# Altium PCB 40%_ws2812.PcbDoc
Units mm, origin at the board's own origin, x right, y up, seen from the top; angles counter-clockwise.
Board outline 228.6 x 76.2 mm, 2 copper layers (Top Layer, Bottom Layer), stack 1.571 mm thick; 40 components, 0 nets, 280 pads, 0 vias.
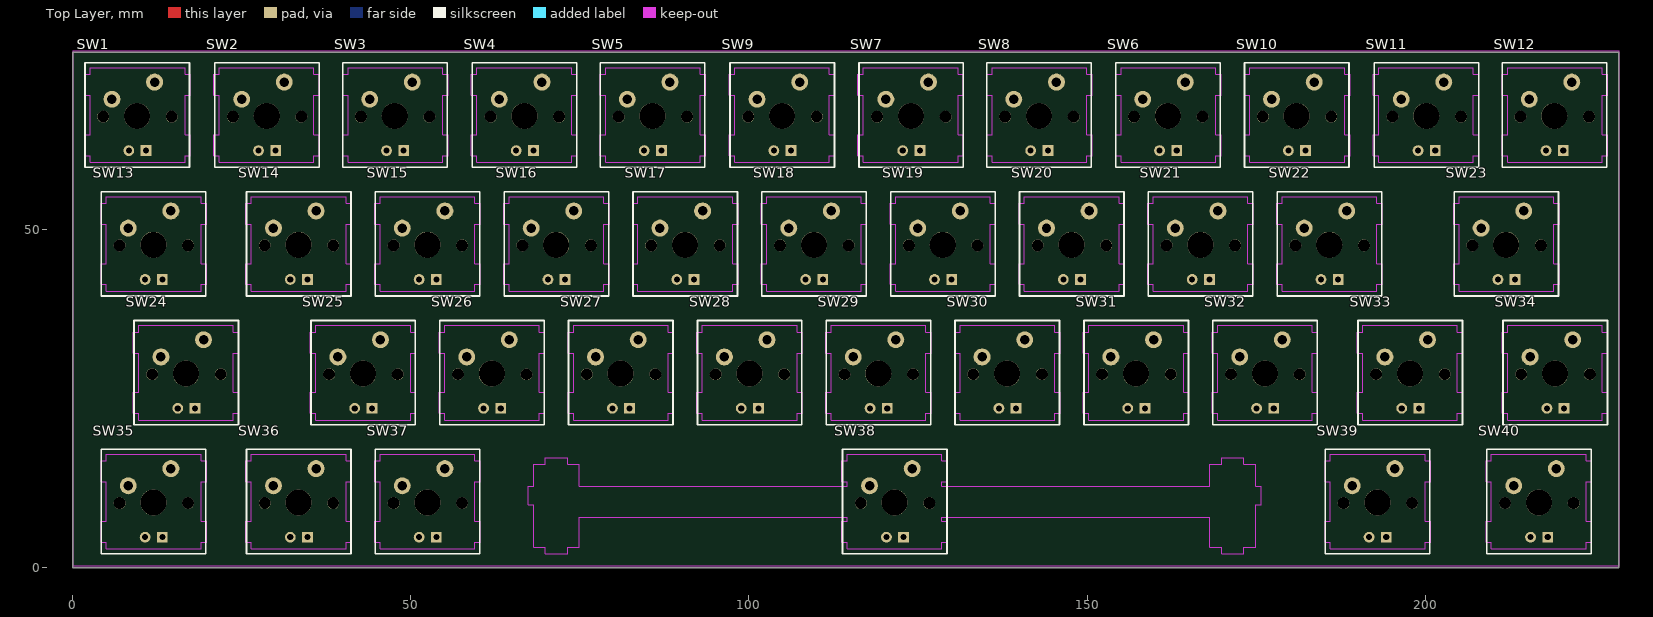
[diagram p0: Top Layer view]
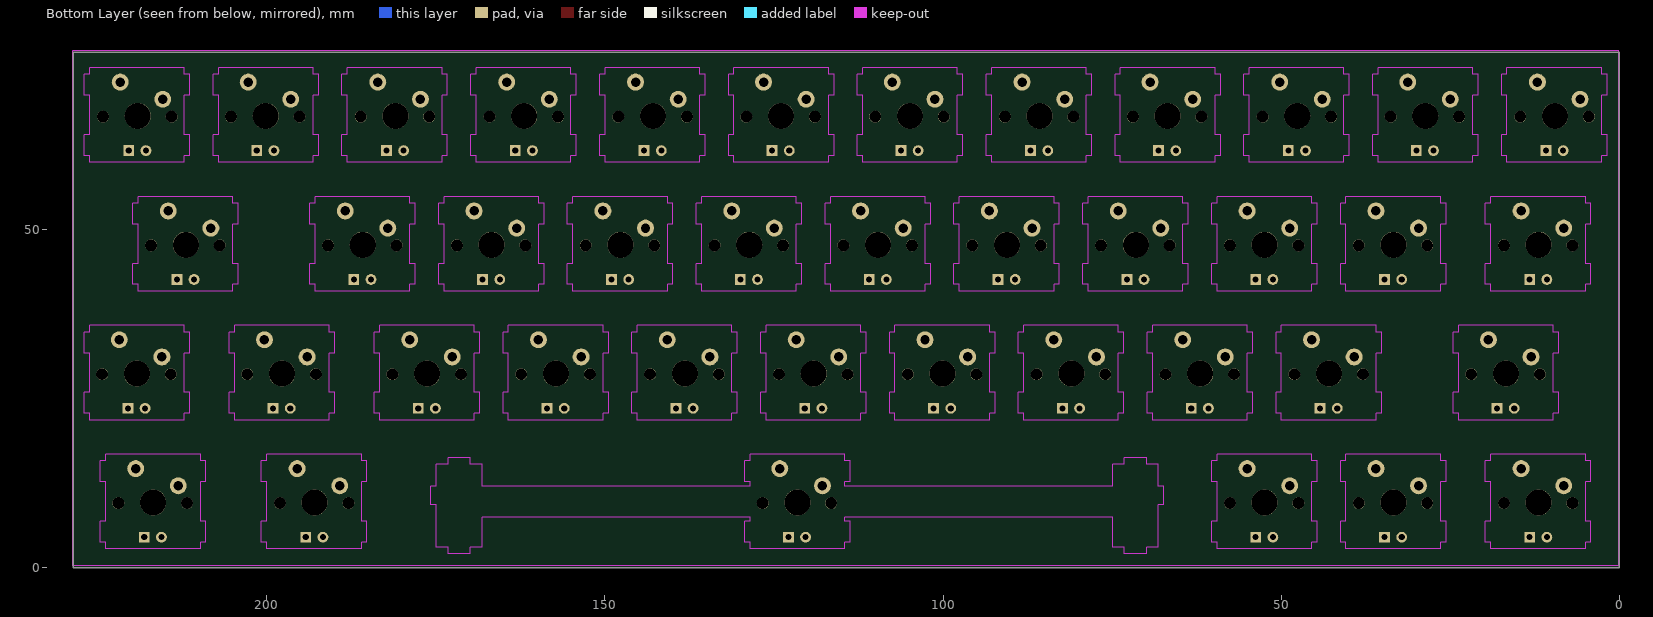
[diagram p1: Bottom Layer view, seen from below]

## Layer stack, top to bottom
Top Solder: solder mask 0.0102, Solder Resist, Dk 3.5
Top Layer: signal copper 0.0356
Dielectric 1: dielectric 1.5, 1.265, Dk 4.8
Bottom Layer: signal copper 0.0356
Bottom Solder: solder mask 0.0102, Solder Resist, Dk 3.5

## Board outline
0,0 228.6,0 228.6,76.2 0,76.2

## Design rules (kind name [scope] priority, off if disabled: settings)
Clearance [All] p1: gap=0.254 ignorepadtopadclearanceinfootprint=FALSE except(0: Arc-Hole Track-Hole SMDPad-Hole THPad-Hole Via-Hole Fill-Hole Poly-Hole Region-Hole Text-Hole)
PolygonConnect [All] p1: connectstyle=Relief reliefconductorwidth=0.254 reliefentries=4 polygonreliefangle="90 Angle" airgapwidth=0.254
RoutingVias [All] p1: holewidth=0.711 width=1.27 viastyle="Through Hole" minholewidth=0.711 minwidth=1.27 maxholewidth=0.711 maxwidth=1.27
SolderMaskExpansion [All] p1: expansion=0.102 istentingtop=FALSE
Width [All] p1: maxlimit=0.254 minlimit=0.254 preferedwidth=0.254
30 further rules are at their usual default settings.

## Components (designator, comment, footprint, x,y, rotation, side; value= is the part's Value field where it differs from the comment)
SW1 "Cherry" SW_Cherry_MX_WS2812 9.525,66.802 r0 top
SW2 "Cherry" SW_Cherry_MX_WS2812 28.702,66.802 r0 top
SW3 "Cherry" SW_Cherry_MX_WS2812 47.625,66.802 r0 top
SW4 "Cherry" SW_Cherry_MX_WS2812 66.802,66.802 r0 top
SW5 "Cherry" SW_Cherry_MX_WS2812 85.725,66.802 r0 top
SW6 "Cherry" SW_Cherry_MX_WS2812 161.925,66.802 r0 top
SW7 "Cherry" SW_Cherry_MX_WS2812 123.952,66.802 r0 top
SW8 "Cherry" SW_Cherry_MX_WS2812 142.875,66.802 r0 top
SW9 "Cherry" SW_Cherry_MX_WS2812 104.902,66.802 r0 top
SW10 "Cherry" SW_Cherry_MX_WS2812 180.975,66.802 r0 top
SW11 "Cherry" SW_Cherry_MX_WS2812 200.152,66.802 r0 top
SW12 "Cherry" SW_Cherry_MX_WS2812 219.075,66.802 r0 top
SW13 "Cherry" SW_Cherry_MX_WS2812 11.938,47.752 r0 top
SW14 "Cherry" SW_Cherry_MX_WS2812 33.401,47.752 r0 top
SW15 "Cherry" SW_Cherry_MX_WS2812 52.451,47.752 r0 top
SW16 "Cherry" SW_Cherry_MX_WS2812 71.501,47.752 r0 top
SW17 "Cherry" SW_Cherry_MX_WS2812 90.551,47.752 r0 top
SW18 "Cherry" SW_Cherry_MX_WS2812 109.601,47.752 r0 top
SW19 "Cherry" SW_Cherry_MX_WS2812 128.651,47.752 r0 top
SW20 "Cherry" SW_Cherry_MX_WS2812 147.701,47.752 r0 top
SW21 "Cherry" SW_Cherry_MX_WS2812 166.751,47.752 r0 top
SW22 "Cherry" SW_Cherry_MX_WS2812 185.801,47.752 r0 top
SW23 "Cherry" SW_Cherry_MX_WS2812 211.963,47.752 r0 top
SW24 "Cherry" SW_Cherry_MX_WS2812 16.764,28.702 r0 top
SW25 "Cherry" SW_Cherry_MX_WS2812 42.926,28.702 r0 top
SW26 "Cherry" SW_Cherry_MX_WS2812 61.976,28.702 r0 top
SW27 "Cherry" SW_Cherry_MX_WS2812 81.026,28.702 r0 top
SW28 "Cherry" SW_Cherry_MX_WS2812 100.076,28.702 r0 top
SW29 "Cherry" SW_Cherry_MX_WS2812 119.126,28.702 r0 top
SW30 "Cherry" SW_Cherry_MX_WS2812 138.176,28.702 r0 top
SW31 "Cherry" SW_Cherry_MX_WS2812 157.226,28.702 r0 top
SW32 "Cherry" SW_Cherry_MX_WS2812 176.276,28.702 r0 top
SW33 "Cherry" SW_Cherry_MX_WS2812 197.739,28.702 r0 top
SW34 "Cherry" SW_Cherry_MX_WS2812 219.202,28.702 r0 top
SW35 "Cherry" SW_Cherry_MX_WS2812 11.938,9.652 r0 top
SW36 "Cherry" SW_Cherry_MX_WS2812 33.401,9.652 r0 top
SW37 "Cherry" SW_Cherry_MX_WS2812 52.451,9.652 r0 top
SW38 "Cherry" SW_Cherry_MX_WS2812 121.539,9.652 r0 top
SW39 "Cherry" SW_Cherry_MX_WS2812 192.913,9.652 r0 top
SW40 "Cherry" SW_Cherry_MX_WS2812 216.789,9.652 r0 top

## Footprints (in the part's own frame and the unit in brackets; to place one, negate y for a bottom-side part, rotate by r counter-clockwise, add the part's x,y. Pads: shape width x height; smd on the part's side, far side on the other; paste and mask are expansions set on the pad)
SW_Cherry_MX_WS2812 [mm] "WS2812键帽"
  round 2.5 hole 1.4: 1(-3.708,2.464) 2(2.591,5.004)
  rect 1.6x1.6 hole 0.9: 3(1.321,-5.131)
  round 1.6 hole 0.9: 4(-1.219,-5.131)
  round 1.75 hole 1.75: ""(-5.004,-0.102) ""(5.131,-0.102)
  round 3.85 hole 3.85: ""(0,0)
  silkscreen extent -7.7,-7.57 7.75,7.85, body extent -9.19,-9.18 9.13,9.12, height 19.05

## Part data
SW1 SW2 SW3 SW4 SW5 SW6 SW7 SW8 SW9 SW10 SW11 SW12 SW13 SW14 SW15 SW16 SW17 SW18 SW19 SW20 SW21 SW22 SW23 SW24 SW25 SW26 SW27 SW28 SW29 SW30 SW31 SW32 SW33 SW34 SW35 SW36 SW37 SW38 SW39 SW40: library part LSW, "带灯机械按键开关", BOM名称=带灯机械按键开关, 学习资源=www.ooocke.com, 版权归属=源创客

## Nets (pads, with @x,y where several pads share a name; then routed paths per layer and width w, separated by ;. In a path a pad name is that pad's centre, name@x,y a point inside that pad or via, vN(x,y) a via of type N, cw(c..) or ccw(c..) an arc to the next point about the centre after c; other vN are vias at no path point)
pads on no net: SW1. SW1.1 SW1.2 SW1.3 SW1.4 SW2. SW2.1 SW2.2 SW2.3 SW2.4 SW3. SW3.1 SW3.2 SW3.3 SW3.4 SW4. SW4.1 SW4.2 SW4.3 SW4.4 SW5. SW5.1 SW5.2 SW5.3 SW5.4 SW6. SW6.1 SW6.2 SW6.3 SW6.4 SW7. SW7.1 SW7.2 SW7.3 SW7.4 SW8. SW8.1 SW8.2 SW8.3 SW8.4 SW9. SW9.1 SW9.2 SW9.3 SW9.4 SW10. SW10.1 SW10.2 SW10.3 SW10.4 SW11. SW11.1 SW11.2 SW11.3 SW11.4 SW12. SW12.1 SW12.2 SW12.3 SW12.4 SW13. SW13.1 SW13.2 SW13.3 SW13.4 SW14. SW14.1 SW14.2 SW14.3 SW14.4 SW15. SW15.1 SW15.2 SW15.3 SW15.4 SW16. SW16.1 SW16.2 SW16.3 SW16.4 SW17. SW17.1 SW17.2 SW17.3 SW17.4 SW18. SW18.1 SW18.2 SW18.3 SW18.4 SW19. SW19.1 SW19.2 SW19.3 SW19.4 SW20. SW20.1 SW20.2 SW20.3 SW20.4 SW21. SW21.1 SW21.2 SW21.3 SW21.4 SW22. SW22.1 SW22.2 SW22.3 SW22.4 SW23. SW23.1 SW23.2 SW23.3 SW23.4 SW24. SW24.1 SW24.2 SW24.3 SW24.4 SW25. SW25.1 SW25.2 SW25.3 SW25.4 SW26. SW26.1 SW26.2 SW26.3 SW26.4 SW27. SW27.1 SW27.2 SW27.3 SW27.4 SW28. SW28.1 SW28.2 SW28.3 SW28.4 SW29. SW29.1 SW29.2 SW29.3 SW29.4 SW30. SW30.1 SW30.2 SW30.3 SW30.4 SW31. SW31.1 SW31.2 SW31.3 SW31.4 SW32. SW32.1 SW32.2 SW32.3 SW32.4 SW33. SW33.1 SW33.2 SW33.3 SW33.4 SW34. SW34.1 SW34.2 SW34.3 SW34.4 SW35. SW35.1 SW35.2 SW35.3 SW35.4 SW36. SW36.1 SW36.2 SW36.3 SW36.4 SW37. SW37.1 SW37.2 SW37.3 SW37.4 SW38. SW38.1 SW38.2 SW38.3 SW38.4 SW39. SW39.1 SW39.2 SW39.3 SW39.4 SW40. SW40.1 SW40.2 SW40.3 SW40.4

## Keep-outs
Keep-Out Layer:
  lines w0.013: 0.095,0.258 0.095,76.458 228.695,76.458 228.695,0.258 0.095,0.258 ; 1.819,60.933 2.62,60.933 2.62,59.934 16.619,59.934 16.619,60.933 17.42,60.933 17.42,64.033 16.619,64.033 16.619,69.833 17.42,69.833 17.42,72.933 16.619,72.933 16.619,73.933 2.62,73.933 2.62,72.933 1.819,72.933 1.819,69.833 2.62,69.833 2.62,64.033 1.819,64.033 1.819,60.933 ; 4.2,3.783 5.001,3.783 5.001,2.784 19,2.784 19,3.783 19.801,3.783 19.801,6.883 19,6.883 19,12.685 19.801,12.685 19.801,15.783 19,15.783 19,16.783 5.001,16.783 5.001,15.783 4.2,15.783 4.2,12.685 5.001,12.685 5.001,6.883 4.2,6.883 4.2,3.783 ; 4.2,41.883 5.001,41.883 5.001,40.884 19,40.884 19,41.883 19.801,41.883 19.801,44.983 19,44.983 19,50.783 19.801,50.783 19.801,53.883 19,53.883 19,54.883 5.001,54.883 5.001,53.883 4.2,53.883 4.2,50.783 5.001,50.783 5.001,44.983 4.2,44.983 4.2,41.883 ; 8.963,22.833 9.762,22.833 9.762,21.834 23.763,21.834 23.763,22.833 24.562,22.833 24.562,25.933 23.763,25.933 23.763,31.734 24.562,31.734 24.562,34.833 23.763,34.833 23.763,35.833 9.762,35.833 9.762,34.833 8.963,34.833 8.963,31.734 9.762,31.734 9.762,25.933 8.963,25.933 8.963,22.833 ; 20.869,60.933 21.67,60.933 21.67,59.934 35.669,59.934 35.669,60.933 36.47,60.933 36.47,64.033 35.669,64.033 35.669,69.833 36.47,69.833 36.47,72.933 35.669,72.933 35.669,73.933 21.67,73.933 21.67,72.933 20.869,72.933 20.869,69.833 21.67,69.833 21.67,64.033 20.869,64.033 20.869,60.933 ; 25.632,3.783 26.432,3.783 26.432,2.784 40.431,2.784 40.431,3.783 41.231,3.783 41.231,6.883 40.431,6.883 40.431,12.685 41.231,12.685 41.231,15.783 40.431,15.783 40.431,16.783 26.432,16.783 26.432,15.783 25.632,15.783 25.632,12.685 26.432,12.685 26.432,6.883 25.632,6.883 25.632,3.783 ; 25.632,41.883 26.432,41.883 26.432,40.884 40.431,40.884 40.431,41.883 41.231,41.883 41.231,44.983 40.431,44.983 40.431,50.783 41.231,50.783 41.231,53.883 40.431,53.883 40.431,54.883 26.432,54.883 26.432,53.883 25.632,53.883 25.632,50.783 26.432,50.783 26.432,44.983 25.632,44.983 25.632,41.883 ; 35.157,22.833 35.957,22.833 35.957,21.834 49.956,21.834 49.956,22.833 50.756,22.833 50.756,25.933 49.956,25.933 49.956,31.734 50.756,31.734 50.756,34.833 49.956,34.833 49.956,35.833 35.957,35.833 35.957,34.833 35.157,34.833 35.157,31.734 35.957,31.734 35.957,25.933 35.157,25.933 35.157,22.833 ; 39.919,60.933 40.72,60.933 40.72,59.934 54.719,59.934 54.719,60.933 55.52,60.933 55.52,64.033 54.719,64.033 54.719,69.833 55.52,69.833 55.52,72.933 54.719,72.933 54.719,73.933 40.72,73.933 40.72,72.933 39.919,72.933 39.919,69.833 40.72,69.833 40.72,64.033 39.919,64.033 39.919,60.933 ; 44.681,3.783 45.482,3.783 45.482,2.784 59.481,2.784 59.481,3.783 60.281,3.783 60.281,6.883 59.481,6.883 59.481,12.685 60.281,12.685 60.281,15.783 59.481,15.783 59.481,16.783 45.482,16.783 45.482,15.783 44.681,15.783 44.681,12.685 45.482,12.685 45.482,6.883 44.681,6.883 44.681,3.783 ; 44.681,41.883 45.482,41.883 45.482,40.884 59.481,40.884 59.481,41.883 60.281,41.883 60.281,44.983 59.481,44.983 59.481,50.783 60.281,50.783 60.281,53.883 59.481,53.883 59.481,54.883 45.482,54.883 45.482,53.883 44.681,53.883 44.681,50.783 45.482,50.783 45.482,44.983 44.681,44.983 44.681,41.883 ; 54.206,22.833 55.007,22.833 55.007,21.834 69.006,21.834 69.006,22.833 69.806,22.833 69.806,25.933 69.006,25.933 69.006,31.734 69.806,31.734 69.806,34.833 69.006,34.833 69.006,35.833 55.007,35.833 55.007,34.833 54.206,34.833 54.206,31.734 55.007,31.734 55.007,25.933 54.206,25.933 54.206,22.833 ; 58.969,60.933 59.77,60.933 59.77,59.934 73.769,59.934 73.769,60.933 74.57,60.933 74.57,64.033 73.769,64.033 73.769,69.833 74.57,69.833 74.57,72.933 73.769,72.933 73.769,73.933 59.77,73.933 59.77,72.933 58.969,72.933 58.969,69.833 59.77,69.833 59.77,64.033 58.969,64.033 58.969,60.933 ; 63.731,41.883 64.532,41.883 64.532,40.884 78.531,40.884 78.531,41.883 79.331,41.883 79.331,44.983 78.531,44.983 78.531,50.783 79.331,50.783 79.331,53.883 78.531,53.883 78.531,54.883 64.532,54.883 64.532,53.883 63.731,53.883 63.731,50.783 64.532,50.783 64.532,44.983 63.731,44.983 63.731,41.883 ; 67.338,9.284 68.162,9.284 68.162,3.014 69.887,3.014 69.887,2.033 73.188,2.033 73.188,3.014 74.913,3.014 74.913,7.483 114.537,7.483 114.537,6.883 113.738,6.883 113.738,3.783 114.537,3.783 114.537,2.784 128.538,2.784 128.538,3.783 129.337,3.783 129.337,6.883 128.538,6.883 128.538,7.483 168.162,7.483 168.162,3.014 169.887,3.014 169.887,2.033 173.188,2.033 173.188,3.014 174.913,3.014 174.913,9.284 175.737,9.284 175.737,12.083 174.913,12.083 174.913,15.313 173.188,15.313 173.188,16.235 169.887,16.235 169.887,15.313 168.162,15.313 168.162,12.083 128.538,12.083 128.538,12.685 129.337,12.685 129.337,15.783 128.538,15.783 128.538,16.783 114.537,16.783 114.537,15.783 113.738,15.783 113.738,12.685 114.537,12.685 114.537,12.083 74.913,12.083 74.913,15.313 73.188,15.313 73.188,16.235 69.887,16.235 69.887,15.313 68.162,15.313 68.162,12.083 67.338,12.083 67.338,9.284 ; 73.256,22.833 74.057,22.833 74.057,21.834 88.056,21.834 88.056,22.833 88.856,22.833 88.856,25.933 88.056,25.933 88.056,31.734 88.856,31.734 88.856,34.833 88.056,34.833 88.056,35.833 74.057,35.833 74.057,34.833 73.256,34.833 73.256,31.734 74.057,31.734 74.057,25.933 73.256,25.933 73.256,22.833 ; 78.019,60.933 78.82,60.933 78.82,59.934 92.819,59.934 92.819,60.933 93.618,60.933 93.618,64.033 92.819,64.033 92.819,69.833 93.618,69.833 93.618,72.933 92.819,72.933 92.819,73.933 78.82,73.933 78.82,72.933 78.019,72.933 78.019,69.833 78.82,69.833 78.82,64.033 78.019,64.033 78.019,60.933 ; 82.781,41.883 83.582,41.883 83.582,40.884 97.581,40.884 97.581,41.883 98.381,41.883 98.381,44.983 97.581,44.983 97.581,50.783 98.381,50.783 98.381,53.883 97.581,53.883 97.581,54.883 83.582,54.883 83.582,53.883 82.781,53.883 82.781,50.783 83.582,50.783 83.582,44.983 82.781,44.983 82.781,41.883 ; 92.306,22.833 93.107,22.833 93.107,21.834 107.107,21.834 107.107,22.833 107.906,22.833 107.906,25.933 107.107,25.933 107.107,31.734 107.906,31.734 107.906,34.833 107.107,34.833 107.107,35.833 93.107,35.833 93.107,34.833 92.306,34.833 92.306,31.734 93.107,31.734 93.107,25.933 92.306,25.933 92.306,22.833 ; 97.069,60.933 97.868,60.933 97.868,59.934 111.869,59.934 111.869,60.933 112.668,60.933 112.668,64.033 111.869,64.033 111.869,69.833 112.668,69.833 112.668,72.933 111.869,72.933 111.869,73.933 97.868,73.933 97.868,72.933 97.069,72.933 97.069,69.833 97.868,69.833 97.868,64.033 97.069,64.033 97.069,60.933 ; 101.831,41.883 102.632,41.883 102.632,40.884 116.632,40.884 116.632,41.883 117.431,41.883 117.431,44.983 116.632,44.983 116.632,50.783 117.431,50.783 117.431,53.883 116.632,53.883 116.632,54.883 102.632,54.883 102.632,53.883 101.831,53.883 101.831,50.783 102.632,50.783 102.632,44.983 101.831,44.983 101.831,41.883 ; 111.356,22.833 112.157,22.833 112.157,21.834 126.157,21.834 126.157,22.833 126.956,22.833 126.956,25.933 126.157,25.933 126.157,31.734 126.956,31.734 126.956,34.833 126.157,34.833 126.157,35.833 112.157,35.833 112.157,34.833 111.356,34.833 111.356,31.734 112.157,31.734 112.157,25.933 111.356,25.933 111.356,22.833 ; 116.119,60.933 116.918,60.933 116.918,59.934 130.919,59.934 130.919,60.933 131.72,60.933 131.72,64.033 130.919,64.033 130.919,69.833 131.72,69.833 131.72,72.933 130.919,72.933 130.919,73.933 116.918,73.933 116.918,72.933 116.119,72.933 116.119,69.833 116.918,69.833 116.918,64.033 116.119,64.033 116.119,60.933 ; 120.881,41.883 121.682,41.883 121.682,40.884 135.682,40.884 135.682,41.883 136.481,41.883 136.481,44.983 135.682,44.983 135.682,50.783 136.481,50.783 136.481,53.883 135.682,53.883 135.682,54.883 121.682,54.883 121.682,53.883 120.881,53.883 120.881,50.783 121.682,50.783 121.682,44.983 120.881,44.983 120.881,41.883 ; 130.406,22.833 131.207,22.833 131.207,21.834 145.207,21.834 145.207,22.833 146.006,22.833 146.006,25.933 145.207,25.933 145.207,31.734 146.006,31.734 146.006,34.833 145.207,34.833 145.207,35.833 131.207,35.833 131.207,34.833 130.406,34.833 130.406,31.734 131.207,31.734 131.207,25.933 130.406,25.933 130.406,22.833 ; 135.169,60.933 135.97,60.933 135.97,59.934 149.969,59.934 149.969,60.933 150.77,60.933 150.77,64.033 149.969,64.033 149.969,69.833 150.77,69.833 150.77,72.933 149.969,72.933 149.969,73.933 135.97,73.933 135.97,72.933 135.169,72.933 135.169,69.833 135.97,69.833 135.97,64.033 135.169,64.033 135.169,60.933 ; 139.931,41.883 140.732,41.883 140.732,40.884 154.732,40.884 154.732,41.883 155.531,41.883 155.531,44.983 154.732,44.983 154.732,50.783 155.531,50.783 155.531,53.883 154.732,53.883 154.732,54.883 140.732,54.883 140.732,53.883 139.931,53.883 139.931,50.783 140.732,50.783 140.732,44.983 139.931,44.983 139.931,41.883 ; 149.456,22.833 150.257,22.833 150.257,21.834 164.257,21.834 164.257,22.833 165.056,22.833 165.056,25.933 164.257,25.933 164.257,31.734 165.056,31.734 165.056,34.833 164.257,34.833 164.257,35.833 150.257,35.833 150.257,34.833 149.456,34.833 149.456,31.734 150.257,31.734 150.257,25.933 149.456,25.933 149.456,22.833 ; 154.219,60.933 155.02,60.933 155.02,59.934 169.019,59.934 169.019,60.933 169.82,60.933 169.82,64.033 169.019,64.033 169.019,69.833 169.82,69.833 169.82,72.933 169.019,72.933 169.019,73.933 155.02,73.933 155.02,72.933 154.219,72.933 154.219,69.833 155.02,69.833 155.02,64.033 154.219,64.033 154.219,60.933 ; 158.981,41.883 159.782,41.883 159.782,40.884 173.782,40.884 173.782,41.883 174.581,41.883 174.581,44.983 173.782,44.983 173.782,50.783 174.581,50.783 174.581,53.883 173.782,53.883 173.782,54.883 159.782,54.883 159.782,53.883 158.981,53.883 158.981,50.783 159.782,50.783 159.782,44.983 158.981,44.983 158.981,41.883 ; 168.506,22.833 169.307,22.833 169.307,21.834 183.307,21.834 183.307,22.833 184.106,22.833 184.106,25.933 183.307,25.933 183.307,31.734 184.106,31.734 184.106,34.833 183.307,34.833 183.307,35.833 169.307,35.833 169.307,34.833 168.506,34.833 168.506,31.734 169.307,31.734 169.307,25.933 168.506,25.933 168.506,22.833 ; 173.269,60.933 174.07,60.933 174.07,59.934 188.069,59.934 188.069,60.933 188.87,60.933 188.87,64.033 188.069,64.033 188.069,69.833 188.87,69.833 188.87,72.933 188.069,72.933 188.069,73.933 174.07,73.933 174.07,72.933 173.269,72.933 173.269,69.833 174.07,69.833 174.07,64.033 173.269,64.033 173.269,60.933 ; 178.031,41.883 178.832,41.883 178.832,40.884 192.832,40.884 192.832,41.883 193.631,41.883 193.631,44.983 192.832,44.983 192.832,50.783 193.631,50.783 193.631,53.883 192.832,53.883 192.832,54.883 178.832,54.883 178.832,53.883 178.031,53.883 178.031,50.783 178.832,50.783 178.832,44.983 178.031,44.983 178.031,41.883 ; 185.175,3.783 185.976,3.783 185.976,2.784 199.975,2.784 199.975,3.783 200.776,3.783 200.776,6.883 199.975,6.883 199.975,12.685 200.776,12.685 200.776,15.783 199.975,15.783 199.975,16.783 185.976,16.783 185.976,15.783 185.175,15.783 185.175,12.685 185.976,12.685 185.976,6.883 185.175,6.883 185.175,3.783 ; 189.938,22.833 190.737,22.833 190.737,21.834 204.738,21.834 204.738,22.833 205.537,22.833 205.537,25.933 204.738,25.933 204.738,31.734 205.537,31.734 205.537,34.833 204.738,34.833 204.738,35.833 190.737,35.833 190.737,34.833 189.938,34.833 189.938,31.734 190.737,31.734 190.737,25.933 189.938,25.933 189.938,22.833 ; 192.319,60.933 193.12,60.933 193.12,59.934 207.119,59.934 207.119,60.933 207.92,60.933 207.92,64.033 207.119,64.033 207.119,69.833 207.92,69.833 207.92,72.933 207.119,72.933 207.119,73.933 193.12,73.933 193.12,72.933 192.319,72.933 192.319,69.833 193.12,69.833 193.12,64.033 192.319,64.033 192.319,60.933 ; 204.225,41.883 205.026,41.883 205.026,40.884 219.025,40.884 219.025,41.883 219.826,41.883 219.826,44.983 219.025,44.983 219.025,50.783 219.826,50.783 219.826,53.883 219.025,53.883 219.025,54.883 205.026,54.883 205.026,53.883 204.225,53.883 204.225,50.783 205.026,50.783 205.026,44.983 204.225,44.983 204.225,41.883 ; 208.988,3.783 209.787,3.783 209.787,2.784 223.788,2.784 223.788,3.783 224.587,3.783 224.587,6.883 223.788,6.883 223.788,12.685 224.587,12.685 224.587,15.783 223.788,15.783 223.788,16.783 209.787,16.783 209.787,15.783 208.988,15.783 208.988,12.685 209.787,12.685 209.787,6.883 208.988,6.883 208.988,3.783 ; 211.369,22.833 212.17,22.833 212.17,21.834 226.169,21.834 226.169,22.833 226.97,22.833 226.97,25.933 226.169,25.933 226.169,31.734 226.97,31.734 226.97,34.833 226.169,34.833 226.169,35.833 212.17,35.833 212.17,34.833 211.369,34.833 211.369,31.734 212.17,31.734 212.17,25.933 211.369,25.933 211.369,22.833 ; 211.369,60.933 212.17,60.933 212.17,59.934 226.169,59.934 226.169,60.933 226.97,60.933 226.97,64.033 226.169,64.033 226.169,69.833 226.97,69.833 226.97,72.933 226.169,72.933 226.169,73.933 212.17,73.933 212.17,72.933 211.369,72.933 211.369,69.833 212.17,69.833 212.17,64.033 211.369,64.033 211.369,60.933

## Silkscreen, mask and mechanical layers (free items; w line width, h text height)
Mechanical 1:
  the board outline again, w0.013